# Altium PCB 消毒小车PCB2.PcbDoc
Units mm, origin at the board's own origin, x right, y up, seen from the top; angles counter-clockwise.
Board outline 57.91 x 59.18 mm, 2 copper layers (Top Layer, Bottom Layer); 20 components, 24 nets, 127 pads, 0 vias.
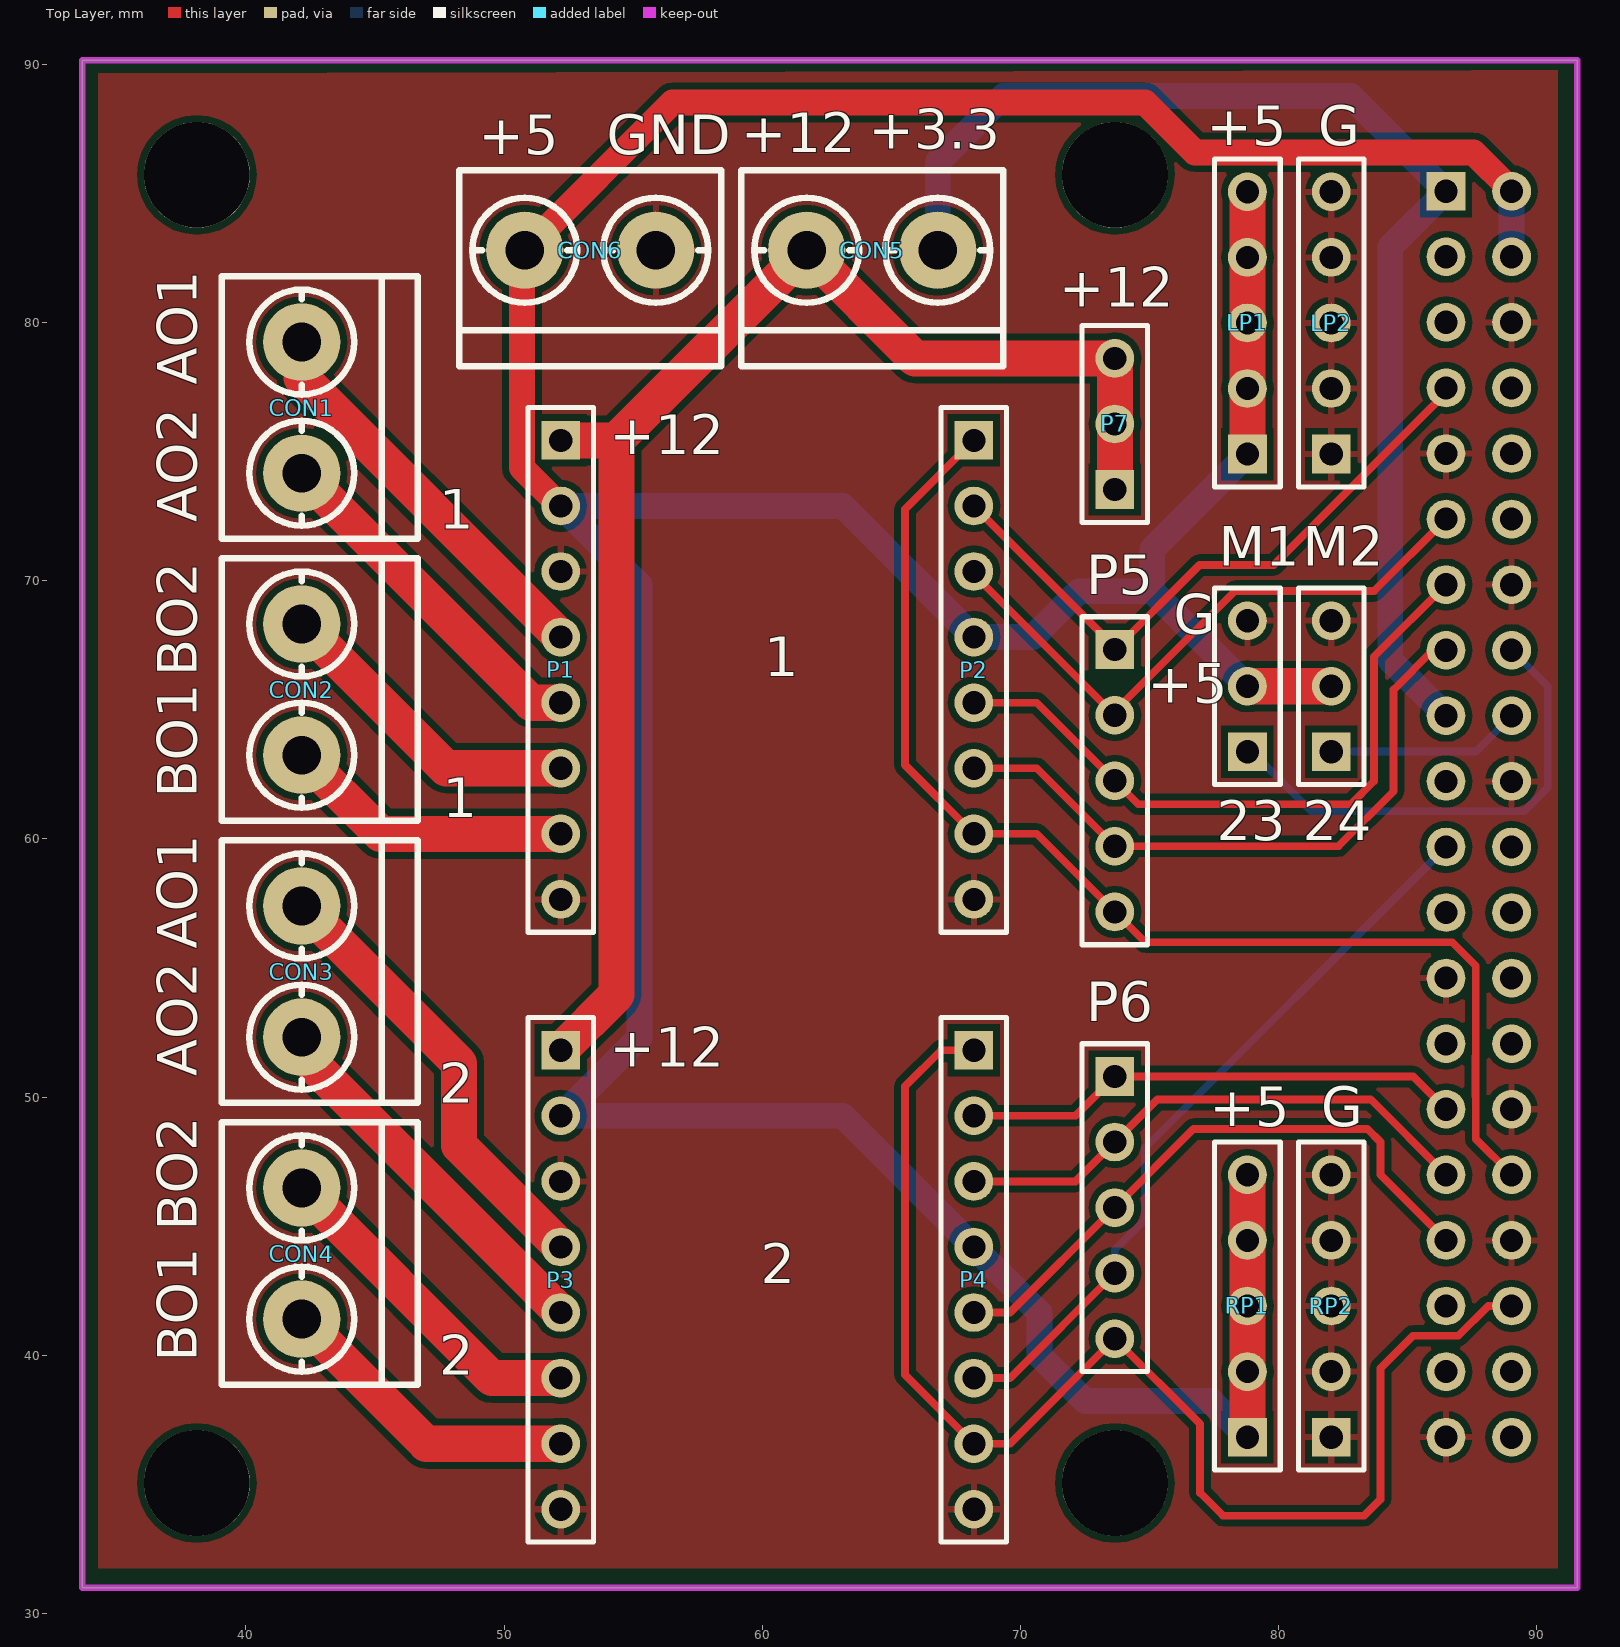
[diagram p0: Top Layer view]
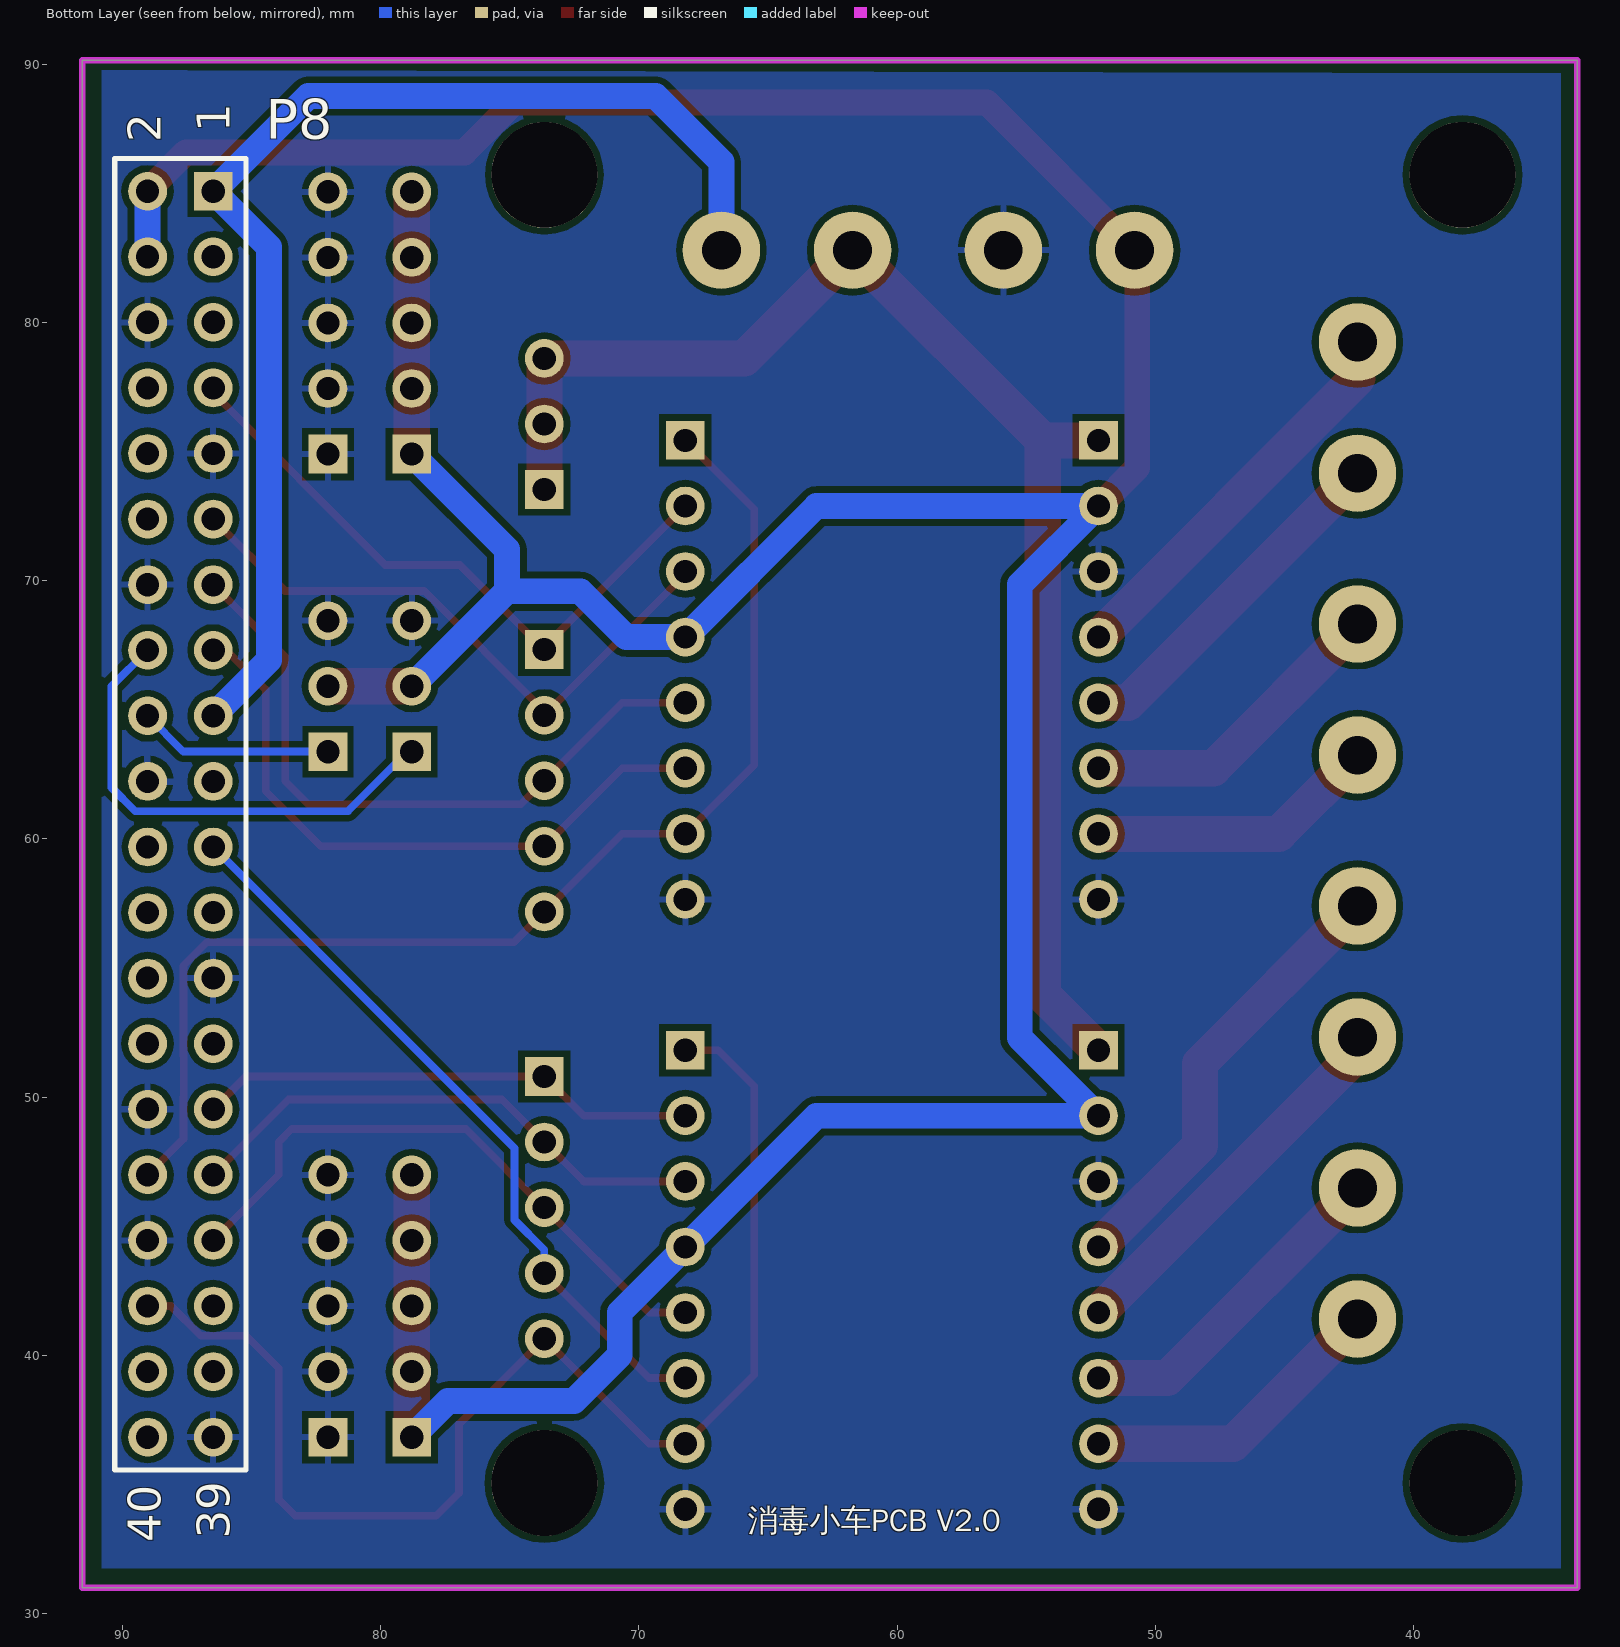
[diagram p1: Bottom Layer view, seen from below]

## Layer stack, top to bottom
Top Solder: solder mask 0.0102, Solder Resist, Dk 3.5
Top Layer: signal copper 0.0356
Dielectric 1: dielectric 0.32, FR-4, Dk 4.8
Bottom Layer: signal copper 0.0356
Bottom Solder: solder mask 0.0102, Solder Resist, Dk 3.5

## Board outline
33.655,30.988 91.567,30.988 91.567,90.17 33.655,90.17

## Design rules (kind name [scope] priority, off if disabled: settings)
Clearance [All] p1: gap=0.254 ignorepadtopadclearanceinfootprint=FALSE except(0: Arc-Hole Track-Hole SMDPad-Hole THPad-Hole Via-Hole Fill-Hole Poly-Hole Region-Hole Text-Hole)
PolygonConnect [All] p1: connectstyle=Relief reliefconductorwidth=0.254 reliefentries=4 polygonreliefangle="90 Angle" airgapwidth=0.254
RoutingVias [All] p1: holewidth=0.711 width=1.27 viastyle="Through Hole" minholewidth=0.711 minwidth=1.27 maxholewidth=0.711 maxwidth=1.27
SolderMaskExpansion [All] p1: expansion=0.102
Width [All] p1: maxlimit=10 minlimit=0.254 preferedwidth=0.3
30 further rules are at their usual default settings.

## Components (designator, comment, footprint, x,y, rotation, side; value= is the part's Value field where it differs from the comment)
CON1 "PowerIn" KF301-2P 42.164,76.708 r0 top
CON2 "PowerIn" KF301-2P 42.164,65.786 r0 top
CON3 "PowerIn" KF301-2P 42.164,54.864 r0 top
CON4 "PowerIn" KF301-2P 42.164,43.942 r0 top
CON5 "PowerIn" KF301-2P 64.262,82.804 r270 top
CON6 "PowerIn" KF301-2P 53.34,82.804 r270 top
LP1 "Header 5" HDR1X5 78.794,74.906 r90 top
LP2 "Header 5" HDR1X5 82.042,74.906 r90 top
M1 "Header 3" HDR1X3 78.794,63.373 r90 top
M2 "Header 3" HDR1X3 82.042,63.373 r90 top
P1 "Header 8" HDR1X8 52.197,75.438 r270 top
P2 "Header 8" HDR1X8 68.199,75.438 r270 top
P3 "Header 8" HDR1X8 52.197,51.816 r270 top
P4 "Header 8" HDR1X8 68.199,51.816 r270 top
P5 "Header 5" HDR1X5 73.66,67.334 r270 top
P6 "Header 5" HDR1X5 73.66,50.8 r270 top
P7 "Header 3" HDR1X3 73.66,73.533 r90 top
P8 "Header 20X2" HDR2X20 86.487,85.09 r270 bottom
RP1 "Header 5" HDR1X5 78.794,36.83 r90 top
RP2 "Header 5" HDR1X5 82.042,36.83 r90 top

## Footprints (in the part's own frame and the unit in brackets; to place one, negate y for a bottom-side part, rotate by r counter-clockwise, add the part's x,y. Pads: shape width x height; smd on the part's side, far side on the other; paste and mask are expansions set on the pad)
HDR1X3 [mm] "Connector; Header; 3 Position"
  rect 1.5x1.5 hole 0.9: 1(0,0)
  round 1.5 hole 0.9: 2(2.54,0) 3(5.08,0)
  silkscreen extent -1.27,-1.27 6.35,1.27
HDR1X5 [mm] "Connector; Header; 5 Position"
  rect 1.5x1.5 hole 0.9: 1(0,0)
  round 1.5 hole 0.9: 2(2.54,0) 3(5.08,0) 4(7.62,0) 5(10.16,0)
  silkscreen extent -1.27,-1.27 11.43,1.27
HDR1X8 [mm] "Connector; Header; 8 Position"
  rect 1.5x1.5 hole 0.9: 1(0,0)
  round 1.5 hole 0.9: 2(2.54,0) 3(5.08,0) 4(7.62,0) 5(10.16,0) 6(12.7,0) 7(15.24,0) 8(17.78,0)
  silkscreen extent -1.27,-1.27 19.05,1.27
HDR2X20 [mm] "Connector; Header; 20x2 Position"
  rect 1.5x1.5 hole 0.9: 1(0,0)
  round 1.5 hole 0.9: 2(0,-2.54) 3(2.54,0) 4(2.54,-2.54) 5(5.08,0) 6(5.08,-2.54) 7(7.62,0) 8(7.62,-2.54) 9(10.16,0) 10(10.16,-2.54) 11(12.7,0) 12(12.7,-2.54) 13(15.24,0) 14(15.24,-2.54) 15(17.78,0) 16(17.78,-2.54) 17(20.32,0) 18(20.32,-2.54) 19(22.86,0) 20(22.86,-2.54) 21(25.4,0) 22(25.4,-2.54) 23(27.94,0) 24(27.94,-2.54) 25(30.48,0) 26(30.48,-2.54) 27(33.02,0) 28(33.02,-2.54) 29(35.56,0) 30(35.56,-2.54) 31(38.1,0) 32(38.1,-2.54) 33(40.64,0) 34(40.64,-2.54) 35(43.18,0) 36(43.18,-2.54) 37(45.72,0) 38(45.72,-2.54) 39(48.26,0) 40(48.26,-2.54)
  silkscreen extent -1.27,-3.81 49.53,1.27
KF301-2P [mm]
  round 3 hole 1.5: 1(0,-2.54) 2(0,2.54)
  silkscreen extent -3.1,-5.08 4.5,5.08

## Part data
CON1 CON2 CON3 CON4 CON5 CON6: library part "Header 2", "Header, 2-Pin"
LP1 LP2 P5 P6 RP1 RP2: "Header, 5-Pin", LatestRevisionDate=17-Jul-2002, LatestRevisionNote="Re-released for DXP Platform.", Publisher="Altium Limited"
M1 M2 P7: "Header, 3-Pin", LatestRevisionDate=17-Jul-2002, LatestRevisionNote="Re-released for DXP Platform.", Publisher="Altium Limited"
P1 P2 P3 P4: "Header, 8-Pin", LatestRevisionDate=17-Jul-2002, LatestRevisionNote="Re-released for DXP Platform.", Publisher="Altium Limited"
P8: "Header, 20-Pin, Dual row", LatestRevisionDate=17-Jul-2002, LatestRevisionNote="Re-released for DXP Platform.", Publisher="Altium Limited"

## Free pads (board coordinates)
  round 4.1 hole 4.1 unplated: ""(38.1,35.052) ""(38.1,85.725) ""(73.66,35.052) ""(73.66,85.725)

## Nets (pads, with @x,y where several pads share a name; then routed paths per layer and width w, separated by ;. In a path a pad name is that pad's centre, name@x,y a point inside that pad or via, vN(x,y) a via of type N, cw(c..) or ccw(c..) an arc to the next point about the centre after c; other vN are vias at no path point)
1AIN1: P2.3 P5.2 P8.11 | length 23.9
  Top Layer w0.3: P2.3 68.199,70.255 P5.2 73.66,64.951 78.316,69.607 83.704,69.607 P8.11
1AIN2: P2.2 P5.1 P8.7 | length 25
  Top Layer w0.3: P2.2 73.66,67.437 P5.1 76.938,70.612 79.819,70.612 86.487,77.28 P8.7
1AO1: CON1.2 P1.4 | length 15.6
  Top Layer w1.4: CON1.2 42.164,77.851 P1.4
1AO2: CON1.1 P1.5 | length 13.7
  Top Layer w1.4: CON1.1 51.054,65.278 P1.5
1BIN1: P2.5 P5.3 P8.13 | length 26.3
  Top Layer w0.3: P2.5 70.636,65.278 P5.3 74.573,61.341 82.804,61.341 83.693,62.23 83.693,67.056 P8.13
1BIN2: P2.6 P5.4 P8.15 | length 25
  Top Layer w0.3: P2.6 70.636,62.738 P5.4 82.32,59.714 84.455,61.849 84.455,65.786 85.979,67.31 P8.15
1BO1: CON2.1 P1.7 | length 11.3
  Top Layer w1.4: CON2.1 45.212,60.198 P1.7
1BO2: CON2.2 P1.6 | length 12.3
  Top Layer w1.4: CON2.2 47.752,62.738 P1.6
1PWMA: P2.1 P2.7 P5.5 P8.32 | length 47.7
  Top Layer w0.3: P2.1 65.532,72.771 65.532,62.865 P2.7 70.636,60.198 P5.5 74.838,55.996 86.733,55.996 87.641,55.088 87.641,51.592 87.63,51.581 87.63,50.03 87.641,50.019 87.641,48.376 P8.32
2AIN1: P4.3 P6.2 P8.31 | length 20.8
  Top Layer w0.3: P4.3 72.136,46.736 P6.2 75.311,49.911 83.566,49.911 P8.31
2AIN2: P4.2 P6.1 P8.29 | length 19.4
  Top Layer w0.3: P4.2 72.136,49.276 P6.1 85.217,50.8 P8.29
2AO1: CON3.2 P3.4 | length 17.4
  Top Layer w1.4: CON3.2 48.26,51.308 48.26,48.133 P3.4
2AO2: CON3.1 P3.5 | length 14.8
  Top Layer w1.4: CON3.1 42.164,51.689 P3.5
2BIN1: P4.5 P6.3 P8.33 | length 23.8
  Top Layer w0.3: P4.5 69.596,41.656 P6.3 76.708,48.768 83.439,48.768 83.947,48.26 83.947,46.99 P8.33
2BIN2: P4.6 P6.4 P8.21 | length 29
  Top Layer w0.3: P4.6 69.596,39.116 P6.4
  Bottom Layer w0.3: P6.4 73.66,44.088 74.814,45.242 74.814,48.017 P8.21
2BO1: CON4.1 P3.7 | length 12
  Top Layer w1.4: CON4.1 46.99,36.576 P3.7
2BO2: CON4.2 P3.6 | length 13.1
  Top Layer w1.4: CON4.2 49.53,39.116 P3.6
2PWMA: P4.1 P4.7 P6.5 P8.36 | length 51.5
  Top Layer w0.3: P4.1 66.929,51.816 65.532,50.419 65.532,39.243 P4.7 69.596,36.576 P6.5 76.962,37.338 76.962,34.671 77.851,33.782 83.312,33.782 83.947,34.417 83.947,39.497 85.206,40.756 86.965,40.756 88.119,41.91 P8.36
3.3V: CON5.2 P8.1 P8.17 | length 47.8
  Bottom Layer w1: CON5.2 66.802,86.233 69.342,88.773 82.804,88.773 P8.1 84.328,82.931 84.328,66.929 P8.17
+5: CON6.1 LP1.1 LP1.2 LP1.3 LP1.4 LP1.5 M1.2 M2.2 P1.2 P2.4 P3.2 P4.4 P8.2 P8.4 RP1.1 RP1.2 RP1.3 RP1.4 RP1.5 | length 175.4
  Top Layer w1: P1.2 52.171,72.898 50.693,74.376 50.693,82.697 CON6.1 56.525,88.529 74.821,88.529 76.756,86.594 87.549,86.594 89.027,85.116 P8.2
  Top Layer w1.4: RP1.1 RP1.2 RP1.3 RP1.4 RP1.5 ; M1.2 M2.2 ; LP1.1 LP1.2 LP1.3 LP1.4 LP1.5
  Bottom Layer w1: P3.2 P3.2@52.223,49.276 ; RP1.1 77.397,38.227 72.517,38.227 70.739,40.005 70.739,41.656 P4.4 63.119,49.276 P3.2@52.223,49.276 ; M1.2 75.111,69.596 ; LP1.1 75.111,71.223 75.111,69.596 ; P8.4 P8.2 ; P3.2@52.223,49.276 55.245,52.298 55.245,69.85 P1.2 63.119,72.898 P2.4 70.485,67.818 72.263,69.596 75.111,69.596
+12: CON5.1 P1.1 P3.1 P7.1 P7.2 P7.3 | length 55.8
  Top Layer w1.4: P3.1 54.356,53.975 54.356,75.438 ; P1.1 54.356,75.438 ; P7.1 P7.2 P7.3 65.913,78.613 CON5.1 54.356,75.438
GND: CON6.2 LP2.1 LP2.2 LP2.3 LP2.4 LP2.5 M1.3 M2.3 P1.3 P1.8 P2.8 P3.3 P3.8 P4.8 P8.6 P8.9 P8.14 P8.20 P8.25 P8.30 P8.34 P8.39 RP2.1 RP2.2 RP2.3 RP2.4 RP2.5
GPIO23: M1.1 P8.16 | length 18.9
  Bottom Layer w0.3: M1.1 78.972,63.373 81.269,61.076 89.505,61.076 90.424,61.995 90.424,65.913 P8.16
GPIO24: M2.1 P8.18 | length 7.6
  Bottom Layer w0.3: M2.1 82.042,63.384 87.641,63.384 P8.18
pads on no net: P8.3 P8.5 P8.8 P8.10 P8.12 P8.19 P8.22 P8.23 P8.24 P8.26 P8.27 P8.28 P8.35 P8.37 P8.38 P8.40

## Polygon pours and split planes (outlines as drawn)
GND on Top Layer "Top Layer-GND" (solid, pour order 0): 34.29,89.662 34.29,31.75 90.805,31.75 90.805,89.789
GND on Bottom Layer "Bottom Layer-GND" (solid, pour order 2): 34.29,89.662 34.29,31.75 90.805,31.75 90.805,89.789

## Keep-outs
Keep-Out Layer:
  lines w0.254: 33.655,30.988 91.567,30.988 91.567,90.17 38.1,90.17 33.655,90.17 33.655,30.988

## Silkscreen, mask and mechanical layers (free items; w line width, h text height)
Top Overlay:
  text "+5" at 77.216,86.868 h1.52
  text "G" at 81.534,86.868 h1.52
  text "+3.3" at 64.135,86.741 h1.52
  text "+12" at 59.182,86.59 h1.52
  text "+5" at 49.022,86.528 h1.52
  text "GND" at 53.975,86.528 h1.52
  text "+12" at 71.501,80.621 h1.52
  text "AO1" at 38.1,77.597 h1.52 r90
  text "+12" at 54.102,74.906 h1.52
  text "AO2" at 38.1,72.263 h1.52 r90
  text "1" at 47.498,72.009 h1.52
  text "G" at 75.946,67.945 h1.52
  text "BO2" at 38.1,66.294 h1.52 r90
  text "1" at 60.071,66.294 h1.52
  text "+5" at 74.93,65.278 h1.52
  text "BO1" at 38.1,61.595 h1.52 r90
  text "1" at 47.625,60.833 h1.52
  text "23" at 77.597,59.944 h1.52
  text "24" at 80.937,59.944 h1.52
  text "AO1" at 38.1,55.753 h1.52 r90
  text "+12" at 54.102,51.181 h1.52
  text "AO2" at 38.1,50.8 h1.52 r90
  text "2" at 47.498,49.784 h1.52
  text "+5" at 77.343,48.871 h1.52
  text "G" at 81.661,48.871 h1.52
  text "BO2" at 38.1,44.831 h1.52 r90
  text "2" at 59.944,42.799 h1.52
  text "BO1" at 38.1,39.751 h1.52 r90
  text "2" at 47.498,39.243 h1.52
Bottom Overlay:
  text "消毒小车PCB V2.0" at 65.786,32.893 h1.5

## Text inside footprints (layer, text, board x,y; h text height)
P8: Bottom Overlay "1" at 85.852,87.376 h1.27 r270; Bottom Overlay "2" at 88.519,86.995 h1.27 r270; Bottom Overlay "40" at 88.519,32.766 h1.27 r270; Bottom Overlay "39" at 85.852,32.893 h1.27 r270